# EAGLE board CCCCL (EAGLE 6.5.0)
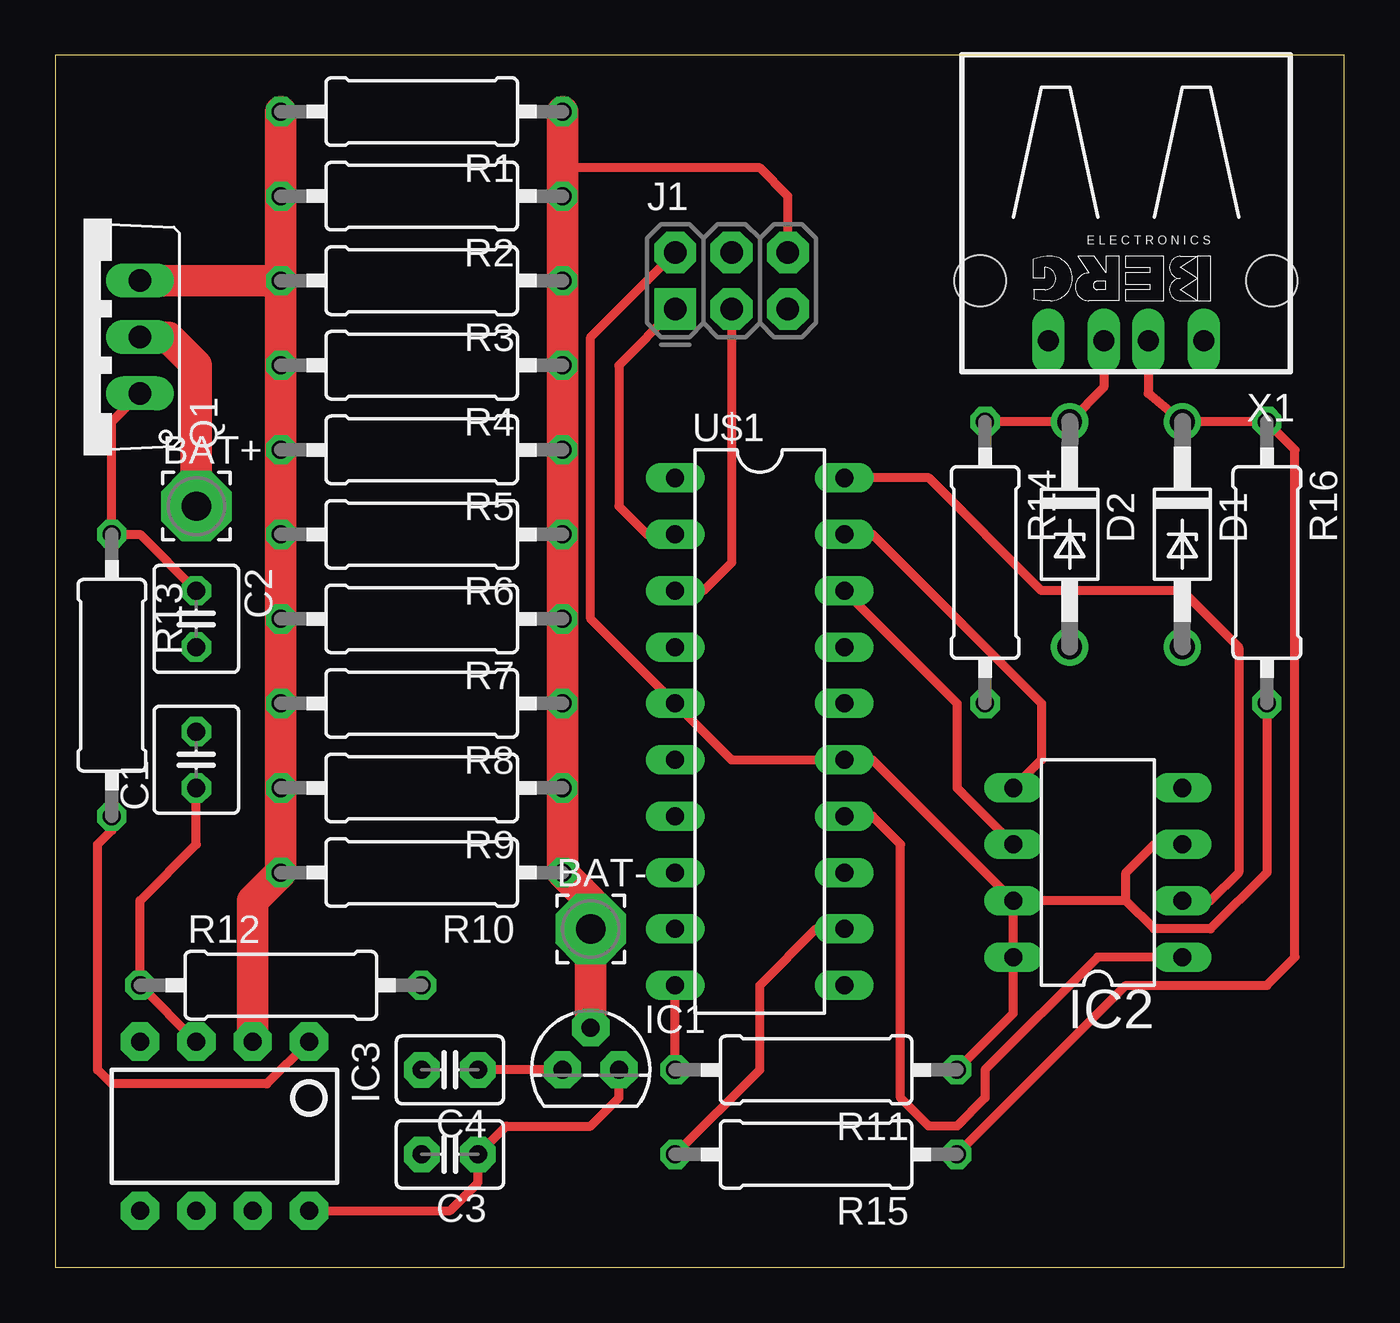
[diagram p0: board, top side]
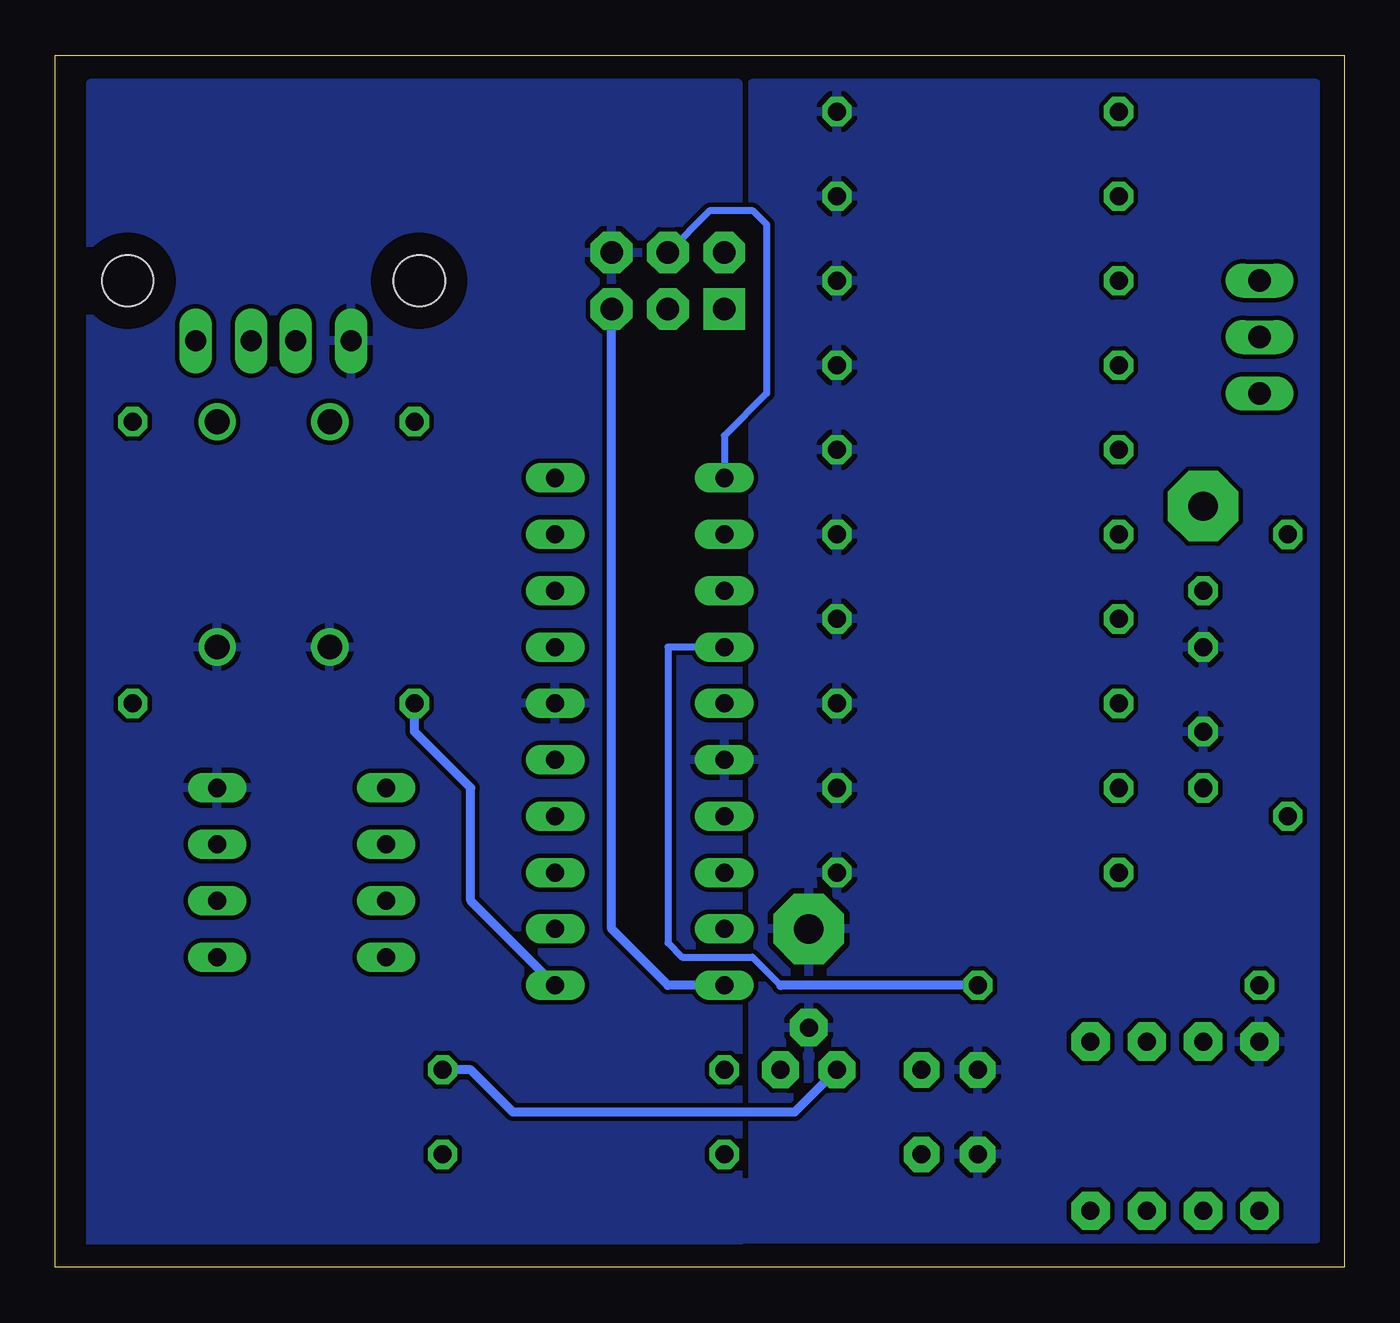
[diagram p1: board, bottom side, seen from below]

Size 58.09 x 54.6 mm. Coordinates in mm from the lower left corner, seen from the top.
Outline: 0,0 58.09,0 58.09,54.6 0,54.6 0,0
Copper layers (1*16): Top 0.035mm / dielectric 1.5mm / Bottom 0.035mm
Design rules "default": minimum track width 10mil, minimum drill 24mil, track to track 8mil, track to pad 8mil, pad to pad 8mil, via to via 8mil, smd to smd 8mil, copper to edge 40mil, drill to drill 8mil, minimum pad ring 10mil, minimum via ring 8mil, stop-mask expansion 4mil, vias tented up to drill 0mil, thermal gap 10mil

## Footprints (pad centres in the part's own frame; a part is rotated, then mirrored left to right if it is on the bottom)
3,17/1,3 = drill 1.321 pad 3.175 octagon: 1 0,0
C025-040X050 = drill 0.813 octagon: 1 -1.27,0; 2 1.27,0
C2.5-3 = drill 0.813 pad 1.6 octagon: 1 -1.27,0; 2 1.27,0
DO41Z10 = drill 1.118: A 5.08,0; C -5.08,0
TO92 = drill 0.813 pad 1.676 octagon: 1 -1.27,0; 2 0,1.905; 3 1.27,0
DIL8 = drill 0.813 long: 1 -3.81,-3.81; 2 -1.27,-3.81; 3 1.27,-3.81; 4 3.81,-3.81; 5 3.81,3.81; 6 1.27,3.81; 7 -1.27,3.81; 8 -3.81,3.81
DIP08 = drill 0.813 pad 1.727 octagon: 1 -3.81,-3.81; 2 -1.27,-3.81; 3 1.27,-3.81; 4 3.81,-3.81; 5 3.81,3.81; 6 1.27,3.81; 7 -1.27,3.81; 8 -3.81,3.81
2X3-NS = drill 1.016 pad 1.88 square: 1 -2.54,-1.27 | drill 1.016 pad 1.88 octagon: 2 -2.54,1.27; 3 0,-1.27; 4 0,1.27; 5 2.54,-1.27; 6 2.54,1.27
TO220V = drill 1.016 long: 1 -2.54,-2.54; 2 0,-2.54; 3 2.54,-2.54
0309/12 = drill 0.813 octagon: 1 -6.35,0; 2 6.35,0
DIL20 = drill 0.813 long: 1 -11.43,-3.81; 2 -8.89,-3.81; 3 -6.35,-3.81; 4 -3.81,-3.81; 5 -1.27,-3.81; 6 1.27,-3.81; 7 3.81,-3.81; 8 6.35,-3.81; 9 8.89,-3.81; 10 11.43,-3.81; 11 11.43,3.81; 12 8.89,3.81; 13 6.35,3.81; 14 3.81,3.81; 15 1.27,3.81; 16 -1.27,3.81; 17 -3.81,3.81; 18 -6.35,3.81; 19 -8.89,3.81; 20 -11.43,3.81
PN87520 = drill 0.95 long: 1 -3.5,2.71; 2 -1,2.71; 3 1,2.71; 4 3.5,2.71 | hole 2.3: -6.57,0; 6.57,0

## Placement (x,y rotation side)
BAT+  [3,17/1,3]  6.35,34.29 0 top
BAT-  [3,17/1,3]  24.13,15.24 0 top
C1  [C025-040X050]  6.35,22.86 90 top
C2  [C025-040X050]  6.35,29.21 270 top
C3  [C2.5-3]  17.78,5.08 180 top
C4  [C2.5-3]  17.78,8.89 180 top
D1  1N4728  [DO41Z10]  50.8,33.02 270 top
D2  1N4728  [DO41Z10]  45.72,33.02 270 top
IC1  7805L  [TO92]  24.13,8.89 0 top
IC2  25LC040P  [DIL8]  46.99,17.78 90 top
IC3  OPAMP-DUALDIP  [DIP08]  7.62,6.35 180 top
J1  AVR_SPI_PRG_6NS  [2X3-NS]  30.48,44.45 0 top
Q1  [TO220V]  1.27,41.91 90 top
R1  [0309/12]  16.51,52.07 180 top
R2  [0309/12]  16.51,48.26 180 top
R3  [0309/12]  16.51,44.45 180 top
R4  [0309/12]  16.51,40.64 180 top
R5  [0309/12]  16.51,36.83 180 top
R6  [0309/12]  16.51,33.02 180 top
R7  [0309/12]  16.51,29.21 180 top
R8  [0309/12]  16.51,25.4 180 top
R9  [0309/12]  16.51,21.59 180 top
R10  [0309/12]  16.51,17.78 180 top
R11  [0309/12]  34.29,8.89 180 top
R12  [0309/12]  10.16,12.7 0 top
R13  [0309/12]  2.54,26.67 270 top
R14  [0309/12]  41.91,31.75 270 top
R15  [0309/12]  34.29,5.08 180 top
R16  [0309/12]  54.61,31.75 270 top
U$1  ATTINY261ADIP  [DIL20]  31.75,24.13 270 top
X1  [PN87520]  48.26,44.45 180 top

## Library data of the parts
BAT+ BAT- = wirepad
C1 C2 = rcl
C3 C4 = capacitor-wima
D1 D2 = diode
IC1 Q1 = adafruit
IC2 = microchip; MF: MICROCHIP; MPN: 25LC040/P; OC_FARNELL: 9758100; OC_NEWARK: 96K4091
IC3 = SparkFun-AnalogIC
J1 = SparkFun-Connectors
R1-R16 = resistor
U$1 = EVT-Eagle-Library
X1 = con-berg; OC_FARNELL: unknown; OC_NEWARK: unknown

## Nets
+5V: C4.1 IC1.1 IC2.3 IC2.7 IC2.8 J1.2 R11.1 R16.2 U$1.5 U$1.15
+15V: C3.1 IC1.3 IC3.8
CS: IC2.1 U$1.14
D+: R15.2 U$1.12
D-: R14.2 U$1.11
DI: IC2.2 U$1.20
DO: IC2.5 U$1.19
GND: BAT-.1 C1.2 C2.2 C3.2 C4.2 D1.A D2.A IC1.2 IC2.4 IC3.4 J1.6 R1.1 R2.1 R3.1 R4.1 R5.1 R6.1 R7.1 R8.1 R9.1 R10.1 U$1.6 U$1.16 X1.4
MISO: J1.1 U$1.2
MOSI: J1.4 U$1.1
N$1: IC3.1 R13.2
N$2: IC3.2 Q1.3 R1.2 R2.2 R3.2 R4.2 R5.2 R6.2 R7.2 R8.2 R9.2 R10.2
N$3: D2.C R14.1 X1.3
N$4: C1.1 IC3.3 R12.1
N$5: C2.1 Q1.1 R13.1
N$6: D1.C R15.1 R16.1 X1.2
PWMOUT: R12.2 U$1.4
RESET: J1.5 R11.2 U$1.10
SCK: J1.3 U$1.3
SCL: IC2.6 U$1.18
VB: BAT+.1 Q1.2

## Tracks (layer width: path | path; a pad name or v marks a point on that pad's centre or on a via)
+5V
  Top 0.406: R16.2 54.61,17.78 52.07,15.24 49.53,15.24 48.26,16.51 | 48.26,16.51 48.26,17.78 49.53,19.05 IC2.3 | 48.26,16.51 IC2.7 | IC1.1 C4.1 | R11.1 43.18,11.43 IC2.8 IC2.7 | IC2.7 36.83,22.86 U$1.15 30.48,22.86 U$1.5 24.13,29.21 24.13,41.91 J1.2
  Bottom 0.406: IC1.1 24.77,6.98 37.46,6.98 39.37,8.89 R11.1
+15V
  Top 0.406: IC3.8 17.78,2.54 19.05,3.81 C3.1 20.32,6.35 24.13,6.35 25.4,7.62 IC1.3
CS
  Top 0.406: IC2.1 46.99,13.97 41.91,8.89 41.91,7.62 40.64,6.35 39.37,6.35 38.1,7.62 38.1,19.05 36.83,20.32 U$1.14
D+
  Top 0.406: R15.2 31.75,8.89 31.75,12.7 34.29,15.24 U$1.12
D-
  Bottom 0.406: U$1.11 39.37,16.51 39.37,21.59 41.91,24.13 R14.2
DI
  Top 0.406: IC2.2 52.07,16.51 53.34,17.78 53.34,27.94 50.8,30.48 44.45,30.48 39.37,35.56 U$1.20
DO
  Top 0.406: IC2.5 44.45,22.86 44.45,25.4 36.83,33.02 U$1.19
GND
  Top 0.406: 22.86,39.37 R3.1 | J1.6 33.02,48.26 31.75,49.53 22.86,49.53
  Top 1.422: R1.1 22.86,49.53 R2.1 R3.1 R4.1 22.86,39.37 R7.1 R8.1 R9.1 R10.1 24.13,16.51 BAT-.1 IC1.2
  pour Bottom: 27.3,53.34 56.52,53.34 56.52,0.64 27.3,0.64
  pour Bottom: 1.27,53.34 26.67,53.34 26.67,3.81 28.57,3.81 28.57,3.18 28.57,1.27 1.27,1.27
MISO
  Top 0.406: J1.1 25.4,40.64 25.4,34.29 26.67,33.02 U$1.2
MOSI
  Bottom 0.305: J1.4 28.57,47.62 26.67,47.62 26.03,46.99 26.03,39.37 27.94,37.47 U$1.1
N$1
  Top 0.406: IC3.1 9.53,8.25 2.54,8.25 1.91,8.89 1.91,19.05 2.54,19.69 R13.2
N$2
  Top 1.422: R3.2 R2.2 R1.2 | R3.2 R4.2 R5.2 R6.2 R7.2 R8.2 R9.2 R10.2 8.89,16.51 IC3.2 | Q1.3 R3.2
N$3
  Top 0.406: X1.3 47.26,39.64 D2.C R14.1
N$4
  Top 0.406: C1.1 6.35,19.05 3.81,16.51 R12.1 IC3.3
N$5
  Top 0.406: C2.1 3.81,33.02 R13.1 2.54,38.1 Q1.1
N$6
  Top 0.406: X1.2 49.26,39.37 D1.C R16.1 55.88,36.83 55.88,13.97 54.61,12.7 48.26,12.7 R15.1
PWMOUT
  Bottom 0.305: U$1.4 30.48,27.94 30.48,14.61 29.84,13.97 26.67,13.97 25.4,12.7
  Bottom 0.406: R12.2 25.4,12.7
RESET
  Top 0.406: R11.2 U$1.10
  Bottom 0.406: U$1.10 30.48,12.7 33.02,15.24 J1.5
SCK
  Top 0.406: J1.3 30.48,31.75 29.21,30.48 U$1.3
SCL
  Top 0.406: U$1.18 40.64,25.4 40.64,21.59 IC2.6
VB
  Top 1.422: BAT+.1 6.35,40.64 5.08,41.91 Q1.2